# Altium PCB LoRaGW_MiniPCIe.PcbDoc (part 3 of 3)
Units mm, origin at the board's own origin, x right, y up, seen from the top; angles counter-clockwise.
Board outline 30.02 x 79.66 mm, 4 copper layers (Top Layer, GND, PWR, Bottom Layer), stack 1.586 mm thick; 138 components, 116 nets, 568 pads, 433 vias.
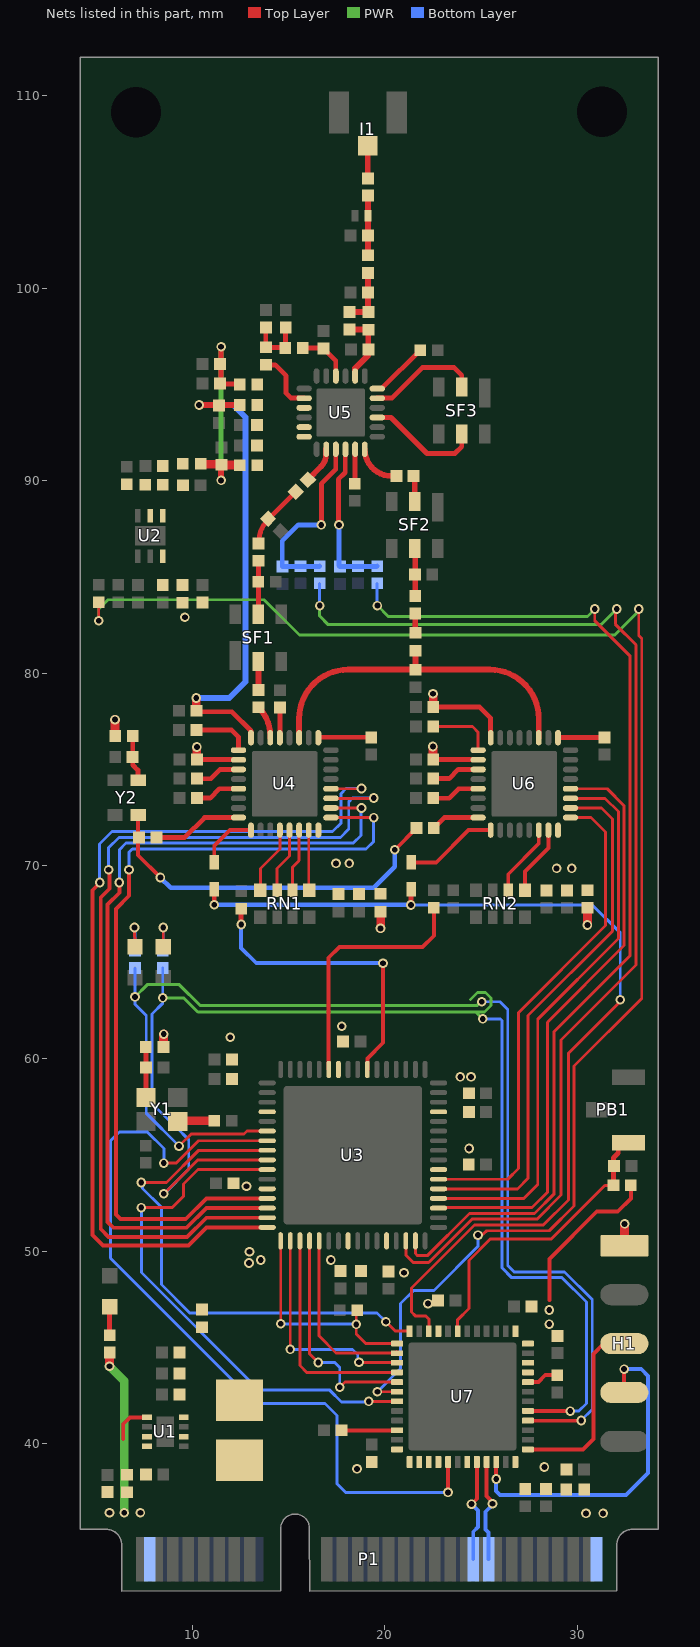
[diagram p4: the nets of this part, all layers, seen from the top]

## Via types
v1: diameter 0.5, hole 0.3, Top Layer to Bottom Layer, tented both sides, 433 vias

## Nets (pads, with @x,y where several pads share a name; then routed paths per layer and width w, separated by ;. In a path a pad name is that pad's centre, name@x,y a point inside that pad or via, vN(x,y) a via of type N, cw(c..) or ccw(c..) an arc to the next point about the centre after c; other vN are vias at no path point) (continued)
GPIO0: U3.58 U7.19 | length 27.1
  Top Layer w0.15: v1@7.442,52.254 8.972,52.254 9.561,52.842 9.561,53.482 10.306,54.228 U3.58@13.9,54.228 ; v1@19.176,42.192 U7.19@20.643,42.193
  Top Layer w0.203: U3.58@13.899,54.229 U3.58@13.9,54.228
  Bottom Layer w0.15: v1(7.366,52.254) 7.366,48.877 13.47,42.774 17.15,42.774 17.757,42.167 19.097,42.167 v1@19.123,42.14
  Bottom Layer w0.203: v1@19.123,42.14 v1(19.175,42.192)
GPIO2: U3.56 U7.12 | length 26.9
  Top Layer w0.15: v1(7.366,53.555) 8.673,53.555 10.346,55.228 U3.56@13.9,55.228 ; v1(20.066,46.33) 20.552,45.843 U7.12@21.293,45.843
  Top Layer w0.203: U7.12@21.273,45.863 U7.12@21.293,45.843
  Bottom Layer w0.15: v1(7.366,53.555) 7.432,53.489 7.432,53.249 8.407,52.273 8.407,48.26 9.881,46.787 19.609,46.787 v1(20.066,46.33)
GPIO3: U3.55 U7.29 | length 42.3
  Top Layer w0.15: v1@8.509,54.566 v1(8.534,54.566) 9.176,54.566 10.338,55.728 U3.55@13.9,55.728
  Top Layer w0.203: v1(23.292,37.465) U7.29@23.293,39.043
  Bottom Layer w0.15: v1(8.534,54.566) 8.534,55.321 7.671,56.185 6.223,56.185 5.766,55.728 5.766,49.629 13.307,42.088 16.894,42.088 17.526,41.456 17.526,37.915 17.976,37.465 v1(23.292,37.465)
IRXD_A: RN1.5 U4.15 | length 3.1
  Top Layer w0.15: U4.15@16.059,71.856 16.059,68.754 RN1.5@16.085,68.727
IRXD_B: RN2.5 U6.15 | length 3.6
  Top Layer w0.2: RN2.5@27.286,68.727 27.286,69.704 28.504,70.922 U6.15@28.504,71.856
ITXD_A: RN1.7 U4.13 | length 3.4
  Top Layer w0.15: RN1.7@14.415,68.727 14.415,69.863 15.059,70.507 U4.13@15.059,71.856
LNA_EN: C35.2 R6.2 R7.2 U5.3 | length 9.9
  Top Layer w0.25: v1(16.713,87.706) 16.713,89.84 17.458,90.584 U5.3@17.458,91.643
  Bottom Layer w0.25: R6.2@16.626,85.565 16.601,85.54 C35.2@14.685,85.54 14.685,86.872 15.519,87.706 v1(16.713,87.706)
MISO_A: U3.62 U4.18 | length 44.3
  Top Layer w0.15: U4.18@17.209,73.006 v1(18.796,73.006)
  Top Layer w0.203: v1(6.223,69.139) 6.223,68.605 5.613,67.996 5.613,51.511 5.918,51.206 9.72,51.206 10.741,52.228 U3.62@13.9,52.228
  Bottom Layer w0.15: v1(6.223,69.139) 6.223,70.841 6.563,71.18 18.374,71.18 18.764,71.571 18.764,72.974 v1(18.796,73.006)
MISO_B: U3.21 U6.18 | length 27.8
  Top Layer w0.15: U3.21@22.8,53.228 26.9,53.228 27.449,53.777 27.449,62.222 31.836,66.608 31.836,72.431 31.261,73.006 U6.18@29.654,73.006
MOSI_A: U3.63 U4.19 | length 47.1
  Top Layer w0.15: U4.19@17.209,73.506 v1@19.431,73.506
  Top Layer w0.203: v1(5.664,69.799) 5.709,69.755 5.709,68.811 5.256,68.358 5.256,51.132 5.664,50.724 9.736,50.724 10.74,51.728 U3.63@13.9,51.728
  Bottom Layer w0.15: v1(5.664,69.799) 5.664,70.942 6.202,71.48 17.709,71.48 18.136,71.907 18.136,73.33 18.329,73.523 v1(19.431,73.523)
MOSI_B: U3.20 U6.19 | length 29.3
  Top Layer w0.15: U3.20@22.8,52.728 27.226,52.728 27.949,53.451 27.949,62.036 32.136,66.223 32.136,72.817 31.447,73.506 U6.19@29.654,73.506
NetC4_2: C4.2 L2.2 U1.5 U1.7 U1.8 | length 2.2
  Top Layer w0.203: 6.426,40.243 6.426,41.021 6.77,41.365 U1.5@7.661,41.365
NetC8_2: C8.2 L5.2 U2.6
NetC36_2: C36.2 U4.1 | length 3
  Top Layer w0.25: C36.2@10.225,77.048 12.055,77.048 12.409,76.694 U4.1@12.409,76.006
NetC37_1: C37.1 U4.30 | length 1.7
  Top Layer w0.3: C37.1@13.45,78.237 cw(c11.98,76.767) 14.059,76.767 U4.30@14.059,76.656
NetC37_2: C37.2 SF1.2 | length 1.5
  Top Layer w0.3: SF1.2@13.437,80.615 cw(c13.404,80.582) 13.45,80.582 C37.2@13.45,79.137
NetC38_1: C38.1 R8.2 R10.2 | length 3.4
  Top Layer w0.25: R8.2@13.45,86.741 cw(c15.261,86.741) 13.98,88.021 C38.1@15.379,89.42
NetC38_2: C38.2 U5.2 | length 1.9
  Top Layer w0.3: C38.2@16.015,90.056 16.698,90.739 ccw(c16.069,91.367) 16.958,91.367 U5.2@16.958,91.643
NetC39_1: C39.1 U4.29 | length 1.6
  Top Layer w0.25: U4.29@14.559,76.656 14.559,78.184 cw(c14.612,78.184) C39.1@14.574,78.221
NetC40_2: C40.2 U4.3 | length 2.4
  Top Layer w0.25: C40.2@10.25,74.529 10.978,74.529 11.455,75.006 U4.3@12.409,75.006
NetC41_2: C41.2 U4.25 | length 2.8
  Top Layer w0.25: U4.25@16.559,76.656 16.578,76.675 C41.2@19.304,76.675
NetC42_1: C42.1 C45.2 L11.1 U5.14 | length 3.7
  Top Layer w0.3: C42.1@18.178,97.851 18.183,97.846 19.147,97.846 L11.1@19.152,97.841 C45.2@19.151,96.825 19.151,96.52 18.467,95.836 18.467,95.453 U5.14@18.458,95.443
NetC42_2: C42.2 C46.2 L11.2 L12.1 | length 3
  Top Layer w0.3: C42.2@18.178,98.751 18.183,98.756 19.147,98.756 L11.2@19.152,98.761 19.142,98.771 19.142,99.762 C46.2@19.133,99.771 L12.1@19.133,100.787
NetC43_2: C43.2 U4.5 | length 2.4
  Top Layer w0.25: C43.2@10.25,73.523 10.937,73.523 11.42,74.006 U4.5@12.409,74.006
NetC44_1: C44.1 C47.2 D2.1 L12.2 | length 3.1
  Top Layer w0.3: C44.1@19.125,104.8 19.133,104.793 L12.2@19.133,101.707
NetC44_2: C44.2 I1.1 | length 1.7
  Top Layer w0.3: I1.1@19.1,107.391 19.125,107.365 C44.2@19.125,105.7
NetC48_2: C48.2 U4.8 | length 4.7
  Top Layer w0.25: C48.2@8.149,71.476 9.622,71.476 10.653,72.506 U4.8@12.409,72.506
NetC49_1: C49.1 L15.2 | length 1
  Top Layer w0.3: C49.1@21.59,83.116 21.59,82.096 L15.2@21.6,82.096 ; L15.2@21.595,82.228 L15.2@21.6,82.223
NetC49_2: C49.2 C54.2 SF2.5 | length 2.5
  Top Layer w0.3: SF2.5@21.558,86.478 cw(c21.558,86.446) 21.59,86.446 C49.2@21.59,84.016
NetC50_1: C50.1 SF2.2 | length 1.4
  Top Layer w0.3: C50.1@21.507,90.246 cw(c21.507,90.194) 21.558,90.194 SF2.2@21.558,88.926
NetC50_2: C50.2 U5.6 | length 2.4
  Top Layer w0.3: U5.6@18.967,91.634 ccw(c20.355,91.634) 20.355,90.246 C50.2@20.607,90.246
NetC51_2: C51.2 C52.2 L13.2 L14.1 | length 3.1
  Top Layer w0.25: C52.2@13.828,97.968 L13.2@13.828,96.936 13.845,96.918 14.811,96.918 14.846,96.953 14.846,97.95 C51.2@14.864,97.968
NetC53_2: C53.2 L14.2 U5.16 | length 2.7
  Top Layer w0.25: L14.2@15.784,96.901 15.796,96.889 16.81,96.889 C53.2@16.823,96.876 17.458,96.241 U5.16@17.458,95.443
NetC55_2: C55.2 U6.1 | length 3.4
  Top Layer w0.15: C55.2@22.523,77.237 24.56,77.237 24.854,76.943 U6.1@24.854,76.006
NetC56_2: C56.2 U6.3 | length 2.5
  Top Layer w0.25: C56.2@22.523,74.535 23.354,74.535 23.825,75.006 U6.3@24.854,75.006
NetC57_2: C57.2 U6.25 | length 2.4
  Top Layer w0.25: U6.25@29.004,76.656 29.014,76.666 31.41,76.666 C57.2@31.42,76.675
NetC58_2: C58.2 U6.5 | length 2.5
  Top Layer w0.25: C58.2@22.523,73.515 23.35,73.515 23.841,74.006 U6.5@24.854,74.006
NetC59_2: C59.2 U6.8 | length 2.5
  Top Layer w0.25: C59.2@22.55,71.958 23.098,72.506 U6.8@24.854,72.506 U6.8@24.848,72.5
NetC60_2: C60.2 L17.2 Y1.4 | length 2.6
  Top Layer w0.25: L17.2@7.595,60.589 7.602,60.583 Y1.4@7.602,57.978
NetC61_2: C61.2 L18.2 Y2.4 | length 2.4
  Top Layer w0.25: L18.2@6.92,76.745 6.92,75.237 7.185,74.971 7.185,74.456 Y2.4@7.199,74.442
NetC63_2: C63.2 U7.22 | length 2.9
  Top Layer w0.203: C63.2@17.757,40.672 20.621,40.672 U7.22@20.643,40.693
NetC64_2: C64.2 PB1.2 R23.1 U7.7 | length 15.7
  Top Layer w0.15: U7.7@23.793,45.843 23.793,46.43 24.372,47.01 24.372,49.513 25.481,50.622 28.651,50.622 31.433,53.404 R23.1@31.884,53.404 ; PB1.2@32.127,55.303 32.452,55.628 PB1.2@32.664,55.628
  Top Layer w0.25: R23.1@31.884,53.404 31.884,54.848 32.127,55.091 PB1.2@32.127,55.303
NetD1_1: D1.1 U4.9 | length 3.1
  Top Layer w0.2: D1.1@11.148,70.18 11.148,71.041 11.963,71.856 U4.9@13.059,71.856
NetD3_1: D3.1 U6.9 | length 4.8
  Top Layer w0.2: D3.1@21.387,70.18 22.682,70.18 24.358,71.856 U6.9@25.504,71.856
NetL1_1: L1.1 U1.2
NetL13_1: L13.1 U5.20 | length 3.2
  Top Layer w0.25: L13.1@13.828,96.016 14.322,96.016 14.884,95.453 14.884,94.539 15.12,94.303 15.798,94.303 U5.20@15.808,94.293
NetL15_1: L15.1 L16.2 U4.27 U6.27 | length 18.3
  Top Layer w0.3: U4.27@15.559,76.656 15.559,77.651 cw(c18.099,77.651) 18.099,80.191 L16.2@21.6,80.191 ; L15.1@21.6,81.176 L16.2@21.6,80.191 ; U6.27@28.004,76.656 28.004,77.651 ccw(c25.464,77.651) 25.464,80.191 L16.2@21.6,80.191
NetLD1_2: LD1.2 R1.1 | length 1.5
  Top Layer w0.25: R1.1@5.715,45.629 5.715,47.095 LD1.2@5.727,47.107
NetLD2_2: LD2.2 R17.2 | length 2
  Top Layer w0.15: LD2.2@8.502,65.799 v1(8.502,66.802)
  Bottom Layer w0.15: R17.2@8.48,65.795 8.502,65.817 v1(8.502,66.802)
NetLD3_2: LD3.2 R15.2 | length 3.4
  Top Layer w0.15: v1(7.01,66.802) LD3.2@7.036,65.799 7.015,66.802 v1@7.01,66.977
  Bottom Layer w0.15: v1@7.01,66.777 7.036,66.751 R15.2@7.036,65.595
NetR2_1: R2.1 R3.2 U2.2
NetR4_1: R4.1 U3.15 | length 54.8
  Top Layer w0.15: U3.15@21.6,50.528 21.604,50.524 21.604,49.875 21.72,49.759 22.214,49.759 24.409,51.954 27.781,51.954 28.803,52.976 28.803,61.391 32.75,65.338 32.75,80.889 30.912,82.728 v1(30.912,83.337)
  PWR w0.15: v1(19.625,83.515) 20.184,82.956 30.531,82.956 v1(30.912,83.337)
  Bottom Layer w0.15: R4.1@19.613,84.665 19.613,83.528 v1(19.625,83.515)
NetR6_1: R6.1 U3.14 | length 60.5
  Top Layer w0.15: U3.14@21.1,50.528 21.1,49.791 21.486,49.405 22.285,49.405 24.534,51.654 27.905,51.654 29.156,52.905 29.156,60.957 33.05,64.851 33.05,81.478 31.979,82.55 v1@31.979,83.312
  PWR w0.15: v1(16.626,83.515) 16.626,82.967 17.069,82.525 31.242,82.525 v1(32.055,83.337)
  Bottom Layer w0.15: v1(16.626,83.515) R6.1@16.626,84.665
NetR8_1: R8.1 R9.2 SF1.5 | length 2.9
  Top Layer w0.25: SF1.5@13.437,83.063 ccw(c13.404,83.095) 13.45,83.095 R8.1@13.45,85.841
  Top Layer w0.3: R9.2@13.341,84.8 cw(c13.341,84.664) R9.2@13.437,84.76
NetR12_1: R12.1 U5.12 | length 3.1
  Top Layer w0.25: U5.12@19.608,94.793 19.858,94.793 R12.1@21.845,96.78
NetR13_2: R13.2 U5.5 | length 1.8
  Top Layer w0.25: U5.5@18.44,91.601 cw(c18.5,91.601) U5.5@18.458,91.643 ; R13.2@18.466,89.823 U5.5@18.466,91.576
NetR14_1: R14.1 U3.39 | length 15.6
  Top Layer w0.203: U3.39@19.1,59.428 19.1,60.001 19.914,60.814 v1(19.914,64.948)
  Top Layer w0.25: v1(12.548,66.954) R14.1@12.548,67.774
  Bottom Layer w0.2: v1(12.548,66.954) 12.548,65.735 13.335,64.948 v1(19.914,64.948)
NetR18_2: R18.2 U3.43 | length 13.2
  Top Layer w0.2: 17.089,65.228 17.646,65.786 21.971,65.786 22.555,66.37 R18.2@22.555,67.825
  Top Layer w0.203: 17.089,65.228 17.089,60.102 17.091,60.099 17.091,59.437 U3.43@17.1,59.428
NetR19_1: R19.1 Y1.3 | length 1.9
  Top Layer w0.45: Y1.3@9.252,56.728 9.292,56.768 R19.1@11.157,56.768
NetR20_1: R20.1 U7.18 | length 81.1
  Top Layer w0.15: v1(5.156,82.728) R20.1@5.156,83.7 ; v1@19.626,42.692 U7.18@20.643,42.693 ; v1(24.848,50.825) 24.915,50.892 25.137,50.892 25.298,51.054 28.55,51.054 29.84,52.345 29.84,59.609 33.35,63.119 33.35,81.813 33.198,81.966 v1@33.198,83.287
  PWR w0.15: v1(5.156,82.728) 5.156,83.337 5.639,83.82 13.741,83.82 15.57,81.991 31.953,81.991 v1@33.198,83.236
  Bottom Layer w0.15: v1(19.625,42.692) 20.828,43.895 20.828,47.269 21.514,47.955 22.555,47.955 24.848,50.248 v1(24.848,50.825)
  other v1: 33.198,83.337
NetR24_2: R24.2 U7.44 | length 1.7
  Top Layer w0.203: U7.44@27.456,43.18 U7.44@27.443,43.193 27.979,43.193 28.339,43.553 R24.2@28.957,43.553
NetSF3_2: SF3.2 U5.11 | length 5.8
  Top Layer w0.25: U5.11@19.608,94.293 19.617,94.303 20.389,94.303 21.971,95.885 23.598,95.885 24.003,95.48 SF3.2@24.003,94.869
NetSF3_5: SF3.5 U5.9 | length 6
  Top Layer w0.25: U5.9@19.608,93.293 U5.9@19.617,93.284 20.331,93.284 22.2,91.415 23.647,91.415 24.003,91.77 SF3.5@24.003,92.421
NSS_A: U3.64 U4.20 | length 47.4
  Top Layer w0.15: U4.20@17.209,74.006 18.786,74.006 v1(18.796,74.016)
  Top Layer w0.203: v1@5.232,69.113 5.204,69.113 4.826,68.735 4.826,50.832 5.366,50.292 9.804,50.292 10.74,51.228 U3.64@13.9,51.228
  Bottom Layer w0.15: v1(5.207,69.139) 5.189,69.157 5.189,71.128 5.842,71.78 17.297,71.78 17.729,72.212 17.729,73.746 17.999,74.016 v1(18.796,74.016)
NSS_B: U3.19 U6.20 | length 30.9
  Top Layer w0.15: U3.19@22.8,52.228 22.826,52.254 27.656,52.254 28.449,53.047 28.449,61.876 32.436,65.862 32.436,73.127 31.556,74.006 U6.20@29.654,74.006
PA12_USB_D_N: P1.36 U7.32 | length 5.4
  Top Layer w0.203: v1(24.511,36.855) 24.793,37.137 U7.32@24.793,39.043
  Bottom Layer w0.203: v1(24.511,36.855) 24.841,36.525 24.841,35.662 24.6,35.42 P1.36@24.6,33.992
PA12_USB_D_P: P1.38 U7.33 | length 5.4
  Top Layer w0.203: U7.33@25.293,39.043 25.291,39.042 25.291,37.273 25.603,36.961 v1(25.603,36.881)
  Bottom Layer w0.203: P1.38@25.4,33.992 25.4,35.39 25.248,35.543 25.248,36.461 25.603,36.817 v1(25.603,36.881)
PA_EN: C34.2 R4.2 R5.2 U5.4 | length 8.2
  Top Layer w0.25: v1(17.628,87.706) 17.6,87.734 17.6,90.068 17.958,90.426 U5.4@17.958,91.643
  Bottom Layer w0.25: v1(17.628,87.706) 17.628,85.584 C34.2@17.672,85.54 19.588,85.54 R4.2@19.613,85.565
QRXD_A: RN1.6 U4.14 | length 3.3
  Top Layer w0.15: RN1.6@15.215,68.727 15.215,69.927 15.559,70.27 U4.14@15.559,71.856
  Top Layer w0.203: U4.14@15.54,71.837 U4.14@15.559,71.856
QRXD_B: RN2.6 U6.14 | length 3.8
  Top Layer w0.2: RN2.6@26.416,68.727 26.416,69.565 28.004,71.153 U6.14@28.004,71.856
QTXD_A: RN1.8 U4.12 | length 3.5
  Top Layer w0.15: RN1.8@13.545,68.727 13.545,69.868 14.559,70.881 U4.12@14.559,71.856
RADIO2_RST: U7.31
RADIO_EN_A: U7.45 | length 0
  Top Layer w0.203: U7.45@27.443,43.693 U7.45@27.444,43.692
RADIO_EN_B: U7.46
RADIO_RST: D1.2 D3.2 U7.10 | length 51.3
  Top Layer w0.15: U7.10@22.293,45.843 22.301,45.852 22.301,46.457 22.123,46.634 21.59,46.634 21.387,46.838 21.387,48.083 24.658,51.354 28.237,51.354 29.54,52.657 29.54,60.271 32.233,62.963 v1(32.233,63.043)
  Top Layer w0.25: v1(11.148,67.982) D1.2@11.148,68.78 ; v1(21.361,67.97) 21.361,68.755 D3.2@21.387,68.78
  Bottom Layer w0.15: v1(21.361,67.97) 30.785,67.97 32.233,66.523 v1(32.233,63.043)
  Bottom Layer w0.25: v1(11.148,67.982) 21.35,67.982 v1(21.361,67.97)
RESET: R11.1 U3.1 U7.13 | length 11.9
  Top Layer w0.15: U3.1@14.6,50.528 14.603,50.525 14.603,46.23 v1(14.605,46.228) ; R11.1@18.524,46.976 v1(18.524,46.19) 18.524,45.687 19.018,45.193 U7.13@20.643,45.193
  Top Layer w0.203: R11.1@18.524,46.976 R11.1@18.567,46.932
  Bottom Layer w0.15: v1@14.605,46.253 14.649,46.209 18.505,46.209 v1(18.524,46.19)
RX_ON: R17.1 U3.57 U7.41 | length 66.7
  Top Layer w0.15: v1@8.539,52.976 10.291,54.728 U3.57@13.9,54.728
  Top Layer w0.203: U7.41@27.443,41.693 29.636,41.693 v1(29.642,41.688)
  PWR w0.15: v1(8.48,63.144) 9.566,63.144 10.298,62.413 24.735,62.413 ; 24.464,63.059 24.821,63.416 25.241,63.416 25.519,63.138 25.519,62.744 25.188,62.413 24.735,62.413 ; v1(25.095,62.052) 24.735,62.413
  Bottom Layer w0.15: R17.1@8.48,64.695 v1(8.48,63.144) 8.48,62.861 7.92,62.301 7.92,57.663 9.144,56.439 9.169,56.439 9.83,55.778 9.83,54.254 8.551,52.976 v1(8.534,52.976) ; v1@24.943,62.052 v1(25.095,62.052) 26.003,62.052 26.091,61.964 26.091,49.126 26.601,48.616 29.218,48.616 30.48,47.353 30.48,42.088 30.08,41.688 v1(29.642,41.688)
SCK_A: U3.61 U4.17 | length 43.9
  Top Layer w0.15: U4.17@17.209,72.506 v1(19.431,72.506)
  Top Layer w0.203: v1(6.727,69.799) 6.725,69.796 6.725,68.447 6.045,67.767 6.045,51.892 6.281,51.656 9.67,51.656 10.741,52.728 U3.61@13.9,52.728
  Bottom Layer w0.15: v1(6.727,69.799) 6.727,70.71 6.898,70.88 19.039,70.88 19.431,71.272 v1(19.431,72.506)
SCK_B: U3.22 U6.17 | length 25.9
  Top Layer w0.15: U3.22@22.8,53.728 26.391,53.728 26.949,54.286 26.949,62.375 31.474,66.9 31.474,71.751 30.72,72.506 U6.17@29.654,72.506
SPI2_MISO: U7.27
SPI2_MOSI: U7.28
SPI2_NSS: U7.25
SPI2_SCK: U7.26
SPI_MISO: U3.3 U7.16 | length 11.7
  Top Layer w0.15: U3.3@15.6,50.528 15.6,44.048 15.955,43.693 U7.16@20.643,43.693
  Top Layer w0.203: U7.16@20.618,43.669 U7.16@20.643,43.693
SPI_MOSI: U3.4 U7.17 | length 11.8
  Top Layer w0.15: U3.4@16.1,50.528 16.1,44.66 v1(16.55,44.21) ; v1(17.669,42.927) 17.935,43.193 20.636,43.193 U7.17@20.639,43.19
  Top Layer w0.203: U7.17@20.639,43.19 U7.17@20.643,43.193
  Bottom Layer w0.15: v1(16.55,44.21) 17.41,44.21 17.669,43.952 v1(17.669,42.927)
SPI_NSS: U3.5 U7.14 | length 9.4
  Top Layer w0.15: U3.5@16.6,50.528 16.6,45.579 17.477,44.702 20.634,44.702 U7.14@20.643,44.693
  Top Layer w0.203: U3.5@16.591,50.519 U3.5@16.6,50.528 ; U7.14@20.613,44.723 U7.14@20.634,44.702
SPI_SCK: U3.2 U7.15 | length 11.7
  Top Layer w0.15: v1(15.1,44.891) U3.2@15.1,50.528 ; v1(18.669,44.227) 18.686,44.21 20.626,44.21 U7.15@20.643,44.193
  Top Layer w0.203: U7.15@20.631,44.182 U7.15@20.643,44.193
  Bottom Layer w0.15: v1(15.1,44.891) 18.33,44.891 18.602,44.619 18.602,44.294 v1(18.669,44.227)
SWCLK: H1.3 U7.37 | length 9.9
  Top Layer w0.203: U7.37@27.443,39.693 30.295,39.693 30.836,40.234 30.836,44.653 31.376,45.193 H1.3@32.451,45.193
SWDIO: H1.4 U7.34 | length 17.6
  Top Layer w0.203: v1(25.793,38.162) U7.34@25.793,39.043 ; v1(32.436,43.866) 32.436,42.669 H1.4@32.451,42.653
  Bottom Layer w0.203: v1(25.793,38.162) 25.793,37.53 25.984,37.338 32.537,37.338 33.68,38.481 33.68,43.51 33.325,43.866 v1(32.436,43.866)
TX_ON: R15.1 U3.54 U7.40 | length 63.1
  Top Layer w0.15: v1(9.322,55.448) 9.957,56.083 12.7,56.083 12.844,56.228 U3.54@13.9,56.228
  Top Layer w0.203: U7.40@27.443,41.193 27.45,41.186 30.191,41.186 v1(30.203,41.199)
  PWR w0.15: v1(7.036,63.195) 7.671,63.83 9.335,63.83 10.406,62.759 24.811,62.759 24.993,62.941 v1(25.044,62.941)
  Bottom Layer w0.15: R15.1@7.036,64.695 v1(7.036,63.195) 7.036,62.814 7.62,62.23 7.62,57.15 v1(9.322,55.448) ; v1(25.044,62.941) 25.984,62.941 26.391,62.535 26.391,49.251 26.726,48.916 29.342,48.916 30.78,47.477 30.78,41.775 v1(30.203,41.199)
VCC0: C33.2 L6.2 U5.23
VCC1: C18.2 L8.2 U5.24
VCC2: L9.2 U5.21
VCC33: C65.2 C66.2 C67.2 C68.2 C69.2 C70.2 C71.2 L19.2 R23.2 U7.1 U7.9 U7.24 U7.36 U7.48 | length 8.4
  Top Layer w0.203: 28.554,47.447 28.554,49.584 31.015,52.045 32.106,52.045 32.784,52.723 R23.2@32.784,53.404 ; L19.2@29.387,37.625 L19.2@29.442,37.571
  other v1: 18.567,38.684 28.296,38.786 28.55,46.203 28.55,46.939 22.25,47.269
VCC_FEM: C17.2 C19.2 C20.2 L7.2 L8.1 L9.1 | length 12.8
  Top Layer w0.25: L7.2@10.439,90.881 L7.2@10.465,90.856 ; C20.2@11.372,95.047 C20.2@11.397,95.021 ; C17.2@11.506,90.856 C17.2@11.532,90.83 C17.2@11.544,90.818 ; v1(11.506,96.952) 11.506,95.105 C20.2@11.448,95.047 11.474,95.021 12.443,95.021 L9.1@12.469,94.996 ; L8.1@12.456,90.818 L8.1@12.469,90.805
  Top Layer w0.3: v1(11.506,90.018) C17.2@11.506,90.856
  Top Layer w0.45: L7.2@10.465,90.856 C17.2@11.506,90.856 ; C17.2@11.544,90.818 L8.1@12.456,90.818
  PWR w0.25: v1(11.506,90.018) v1(11.506,96.952)
VCC_FEM_1: C9.2 C10.2 L7.1 R2.2 U2.1
VCCA_A: C5.2 C14.2 C15.2 C16.2 C32.2 L3.2 L6.1 U4.2 U4.16 U4.32 | length 28.5
  Top Layer w0.25: C14.2@10.225,78.054 10.275,78.003 12.065,78.003 13.059,77.01 U4.32@13.059,76.656 ; C16.2@10.25,75.535 10.269,75.516 12.399,75.516 U4.2@12.409,75.506 ; L6.1@12.451,93.912 L6.1@12.469,93.929
  Top Layer w0.3: v1(10.363,93.929) L6.1@12.469,93.929
  Top Layer w0.45: v1(10.211,78.715) 10.211,78.068 C14.2@10.225,78.054 ; C16.2@10.25,75.535 v1(10.25,76.175)
  Bottom Layer w0.3: v1(10.211,78.715) 11.925,78.715 12.776,79.566 12.776,93.294 12.141,93.929 v1(10.363,93.929)
  other v1: 17.475,70.129 18.161,70.129
VCCA_B: C6.2 C11.2 C12.2 C13.2 L4.2 U6.2 U6.16 U6.32 | length 7.9
  Top Layer w0.25: C6.2@22.523,75.531 22.538,75.516 24.845,75.516 U6.2@24.854,75.506 ; C12.2@22.523,78.257 24.917,78.257 25.504,77.671 U6.32@25.504,76.656
  Top Layer w0.45: v1(22.504,76.2) 22.513,76.191 22.513,75.54 C6.2@22.523,75.531 ; v1(22.513,78.943) 22.518,78.939 22.518,78.262 C12.2@22.523,78.257
  other v1: 28.931,69.868 29.718,69.868
VCCDIG18: C23.2 C24.2 C25.2 C26.2 C27.2 C28.2 L10.2 U3.8 U3.12 U3.23 U3.42 U3.60 | length 0
  Top Layer w0.203: C27.2@12.113,53.489 C27.2@12.142,53.518
  other v1: 21.006,48.87 12.954,49.378 13.564,49.53 17.209,49.53 12.979,49.962 12.827,53.365 24.384,55.321 17.773,61.671
VCCDIG18_1: C2.2 C3.2 C22.2 L1.2 L10.1 U1.4
VCCDIG33: C1.2 C7.2 C21.2 C29.2 C30.2 C31.2 H1.1 L2.1 L3.1 L4.1 L5.1 L17.1 L18.1 L19.1 P1.2 P1.52 R1.2 U3.29 U3.52 | length 13.1
  Top Layer w0.45: v1(5.709,44.018) 5.715,44.025 R1.2@5.715,44.729 ; v1(5.994,77.597) 5.994,77.558 6.02,77.533 6,77.512 L18.1@6,76.745 ; L17.1@8.515,60.589 8.519,60.594 8.519,61.25 v1(8.534,61.265) ; v1(19.787,66.751) 19.791,66.756 L3.1@19.791,67.628 ; v1(30.529,66.929) 30.531,66.93 L4.1@30.531,67.815 ; H1.1@32.451,50.273 32.451,51.4 v1(32.461,51.41)
  PWR w0.45: v1(5.709,44.018) 6.477,43.25 v1(6.477,36.41)
  other v1: 30.455,36.373 31.344,36.373 5.709,36.41 7.318,36.41 23.927,59.041 24.486,59.041 11.977,61.102 9.627,82.906
XTL_OUT: C48.1 C59.1 Y2.3 | length 19
  Top Layer w0.203: Y2.3@7.199,72.642 7.199,70.55 v1(8.357,69.393) ; v1(20.523,70.831) C59.1@21.65,71.958
  Bottom Layer w0.25: v1(8.357,69.393) 8.89,68.859 19.431,68.859 20.523,69.952 v1(20.523,70.831)
pads on no net: P1.1 P1.3 P1.5 P1.6 P1.7 P1.8 P1.10 P1.11 P1.12 P1.13 P1.14 P1.16 P1.17 P1.19 P1.20 P1.22 P1.23 P1.24 P1.25 P1.28 P1.30 P1.31 P1.32 P1.33 P1.39 P1.41 P1.42 P1.44 P1.45 P1.46 P1.47 P1.48 P1.49 P1.51 PB1.3 U2.5 U3.13 U3.16 U3.17 U3.18 U3.25 U3.26 U3.27 U3.28 U3.32 U3.33 U3.37 U3.38 U3.48 U3.49 U4.6 U4.10 U4.21 U4.22 U4.23 U4.24 U5.19 U5.22 U6.6 U6.11 U6.21 U6.22 U6.23 U6.24 U6.29 U6.30 U7.2 U7.3 U7.4 U7.6 U7.11 U7.30 U7.38 U7.39 U7.42 U7.43

## Polygon pours and split planes (outlines as drawn)
GND on PWR "PWR-GND" (solid, remove dead copper, pour order 12): 4.216,112.014 34.29,112.014 34.29,35.535 34.214,35.458 34.099,35.573 4.229,35.573 4.229,111.9 4.267,111.938
VCCDIG33 on PWR "PWR-VCCDIG33" (solid, remove dead copper, pour order 10): 4.216,35.56 4.242,35.585 34.087,35.585 34.214,35.712 34.214,60.096 31.039,63.271 31.039,68.81 30.786,69.063 12.725,69.063 10.249,71.539 10.249,83.731 5.359,83.731 5.359,60.173 5.791,59.741 22.149,59.741 27.864,54.026 27.864,39.649 27.254,39.04 27.203,39.091 4.115,39.091
GND on Bottom Layer "Bottom Layer-GND" (solid, remove dead copper, pour order 4): 4.267,112.014 34.087,112.014 34.188,111.912 34.188,35.56 4.242,35.56 4.216,35.585
GND on GND "GND-GND" (solid, remove dead copper, pour order 6): 4.191,111.989 4.216,112.014 34.163,112.014 34.163,35.56 34.138,35.535 4.216,35.535
GND on Top Layer "Top Layer-GND" (solid, remove dead copper, pour order 8): 4.409,111.887 34.305,111.887 34.356,111.836 34.356,35.408 4.384,35.408 4.359,35.433

## Other copper
Top Layer:
  region net GND: 19.066,48.387 17.015,48.387 16.815,48.187 16.815,46.39 16.933,46.272 17.84,46.272 17.958,46.389 17.958,47.484 18.216,47.742 19.078,47.742 19.113,47.777 19.113,48.339
  region net GND: 7.874,90.424 7.87,90.428 6.155,90.428 6.096,90.487 6.096,91.745 6.21,91.859 7.763,91.859 7.899,91.723 7.899,90.449
  region net GND: 17.958,96.531 17.106,97.384 16.383,97.384 16.332,97.434 16.332,98.679 16.434,98.781 17.262,98.781 17.323,98.72 17.323,97.561 17.653,97.231 18.542,97.231 18.567,97.206 18.567,96.52 18.136,96.088 18.136,95.174 18.059,95.098 17.848,95.098 17.848,95.106 17.805,95.148 17.805,96.743 17.8,96.749
  region net VCCDIG33: 23.673,59.36 24.74,59.36 24.74,56.902 24.708,56.871 23.92,56.871 23.717,57.074 22.377,57.074 22.327,57.125 22.327,57.34 22.39,57.404 23.502,57.404 23.647,57.549 23.647,59.334
  pour cut-out: 14.097,53.035 11.913,53.035 11.735,53.213 11.735,56.54 14.097,56.54
  region net NetR2_1: 6.274,90.119 7.849,90.119 7.899,90.068 7.899,88.951 8.001,88.849 8.001,87.808 7.976,87.782 7.734,87.782 7.645,87.871 7.645,88.697 7.137,89.205 6.318,89.205 6.198,89.325 6.198,90.094
  region net VCC_FEM_1: 8.178,91.338 8.152,91.309 8.149,89.413 8.306,89.256 8.306,87.833 8.331,87.808 8.89,87.808 8.966,87.884 8.966,88.993 9.203,89.23 9.717,89.23 9.855,89.369 9.855,91.309 9.749,91.415 8.242,91.415
  region: 8.204,90.119
  region net VCCDIG33: 9.169,83.998 10.897,83.998 10.978,83.917 10.978,82.565 10.861,82.448 9.195,82.448 9.119,82.525 9.119,83.947
  region net GND: 5.867,84.023 8.788,84.023 8.839,83.972 8.839,82.626 8.661,82.448 6.071,82.448 5.867,82.652
  region: 5.893,84.023
  region net NetC8_2: 8.306,86.446 8.306,85.598 8.001,85.293 8.001,84.379 8.103,84.277 9.804,84.277 9.83,84.303 9.83,85.362 9.645,85.547 8.788,85.547 8.636,85.7 8.636,86.421 8.611,86.446
  region net FEM_EN: 4.801,84.277 7.468,84.277 7.518,84.328 7.518,85.344 7.341,85.522 7.341,86.436 6.883,86.436 6.731,86.284 6.731,85.395 6.401,85.065 4.801,85.065 4.724,84.988 4.724,84.353
  region net GND: 17,95.021 17.12,95.141 17.12,96.037 16.789,96.368 14.887,96.368 14.811,96.291 14.811,95.97 15.455,95.326 16.027,95.326 16.332,95.021
  region net GND: 10.846,96.672 10.77,96.749 9.525,96.749 9.35,96.574 9.35,94.688 9.449,94.59 10.77,94.59 10.846,94.666
  pour cut-out: 15.241,90.359 12.962,90.359 12.812,90.509 12.812,96.006 12.839,96.034 14.648,96.034 15.241,95.441
  region net GND: 12.767,93.218 11.887,93.218 11.786,93.32 10.211,93.32 9.993,93.102 9.993,91.759 10.338,91.415 12.065,91.415 12.167,91.516 12.776,91.516 12.802,91.542 12.802,93.183
  region net GND: 28.067,68.148 29.775,68.148 29.82,68.103 29.82,66.589 29.677,66.446 28.08,66.446 27.991,66.536 27.991,68.072
  region net GND: 26.899,71.399 27.555,71.399 27.656,71.501 27.656,72.242 27.584,72.314 26.924,72.314 26.822,72.212 26.822,71.476 26.848,71.45
  region net GND: 22.377,58.369 22.403,58.395 23.222,58.395 23.266,58.35 23.266,57.633 23.216,57.582 22.428,57.582 22.346,57.664 22.346,58.331
  region net GND: 17.201,67.945 17.018,67.762 17.018,66.573 17.12,66.472 19.025,66.472 19.1,66.547 19.1,67.812 18.967,67.945
  region: 17.12,67.996
  region net GND: 18.995,50.063 19.71,50.063 19.761,50.114 19.761,51.003 19.71,51.054 18.987,51.054 18.95,51.017 18.95,50.093
  region net GND: 16.967,50.071 17.661,50.071 17.757,50.167 17.757,50.971 17.711,51.017 16.981,51.017 16.94,50.976 16.926,50.976 16.926,50.114
  region net GND: 13.513,58.369 14.338,58.369 14.376,58.331 14.376,57.633 14.326,57.582 13.503,57.582 13.437,57.673 13.437,58.293
  region net GND: 24.882,56.81 25.797,56.81 25.924,56.937 25.924,59.268 25.832,59.36 25.044,59.36 24.882,59.198
  pour cut-out: 21.59,46.152 29.274,46.152 29.274,47.511 21.59,47.511
  pour cut-out: 27.48,46.094 27.48,41.554 29.26,41.554 29.26,46.094
  region net VCC33: 27.301,47.625 29.197,47.625 29.388,47.434 29.388,45.288 29.312,45.212 28.194,45.212 28.016,45.034 27.153,45.034 27.127,45.06 27.127,45.415 27.026,45.517 26.654,45.517 26.619,45.552 26.619,46.33 26.797,46.507 27.203,46.507 27.301,46.605
  pour cut-out: 6.869,56.244 11.709,56.244 11.709,58.753 6.869,58.753
  region net GND: 11.514,58.48 10.389,58.48 10.173,58.696 10.173,61.04 10.356,61.223 11.362,61.223 11.527,61.058 11.527,58.591
  region net GND: 20.345,76.124 20.472,75.997 20.472,75.438 20.244,75.209 18.974,75.209 18.974,76.098 18.999,76.124
  region net GND: 8.763,42.139 8.763,45.812 8.703,45.872 7.188,45.872 6.96,45.644 6.96,42.231 7.078,42.113 8.687,42.113
  region net GND: 9.093,41.58
  pour cut-out: 11.125,41.097 13.894,41.097 14.021,41.224 14.021,46.52 14.262,46.761 15.853,46.761 15.955,46.66 15.951,46.656 15.951,40.538 15.896,40.538 15.723,40.365 15.701,40.386 11.148,40.386
  region net VCCDIG18: 10.704,46.635 10.221,46.635 10.069,46.787 10.069,50.038 10.476,50.444 13.638,50.444 13.945,50.138 13.945,46.893 13.687,46.635 10.908,46.635
  region net VCCDIG18_1: 9.957,41.224 10.135,41.402 10.82,41.402 11.125,41.097 13.894,41.097 14.021,41.224 14.021,43.612 13.894,43.739 11.328,43.739 11.328,46.05 10.973,46.406 9.271,46.406 9,46.135 9,42.359 9.322,42.037 9.322,41.224
  region net NetL1_1: 9.296,40.513 9.296,40.208 9.906,40.208 10.185,39.929 10.185,37.973 10.236,37.922 13.868,37.922 13.945,37.998 13.945,40.259 13.818,40.386 10.236,40.386 10.109,40.513
  region: 9.561,40.865
  region net GND: 8.128,41.656 8.103,41.631 8.103,38.049 8.23,37.922 9.068,37.922 9.169,38.024 9.169,41.631 9.093,41.707 8.204,41.707
  region net NetC4_2: 6.274,38.075 7.874,38.075 7.925,38.125 7.925,40.513 7.899,40.538 6.375,40.538 6.274,40.437
  region net GND: 6.274,37.948
  region net VCCDIG33: 5.207,37.77 6.96,37.77 7.036,37.694 7.036,37.033 7.214,36.855 7.798,36.855 7.874,36.779 7.874,35.941 7.823,35.89 5.245,35.89 5.156,35.979 5.156,37.744
  region net VCCA_B: 28.829,72.238 28.829,70.485 28.004,69.66 28.004,68.465 28.042,68.428 30.886,68.428 30.963,68.504 30.963,69.774 29.185,71.552 29.185,72.212 29.108,72.288 28.88,72.288
  region net GND: 21.92,79.654 20.288,79.654 20.022,79.477 20.022,73.272 20.288,73.006 21.901,73.006 22.096,73.201 22.096,79.502
  pour cut-out: 24.512,73.11 22.233,73.11 22.083,73.26 22.083,78.758 22.11,78.785 22.346,78.785 22.346,75.186 22.408,75.124 22.408,74.085 24.36,74.085 24.512,73.934
  pour cut-out: 4.191,75.032 8.23,75.032 8.255,75.006 8.255,72.111 4.267,72.111 4.216,72.06
  pour cut-out: 4.166,76.2
  region net GND: 9.601,78.562 8.433,78.562 8.28,78.41 8.28,73.177 8.509,72.949 9.576,72.949 9.682,73.055 9.682,78.461
  pour cut-out: 12.097,73.134 9.818,73.134 9.668,73.284 9.668,78.782 9.696,78.809 9.931,78.809 9.931,75.209 9.993,75.147 9.993,74.109 11.946,74.109 12.097,73.958
  region net VCCA_A: 16.383,72.263 16.383,70.528 17.018,69.893 17.018,68.301 17.12,68.199 20.142,68.199 20.244,68.301 20.244,69.707 19.39,70.561 17.45,70.561 16.713,71.298 16.713,72.238 16.637,72.314 16.434,72.314
  pour cut-out: 24.795,38.735 29.794,38.76 29.794,37.313 24.795,37.313
  region net GND: 20.963,40.337 20.914,40.386 18.313,40.386 18.204,40.276 18.204,39.653 18.259,39.599 19.732,39.599 20.163,40.03 20.914,40.03 20.963,40.079
  region net VCC33: 20.955,39.878
  pour cut-out: 11.722,60.852 11.722,56.312 13.503,56.312 13.503,60.852
  pour cut-out: 24.74,54.029 24.74,58.649 23.216,58.649 23.216,54.029
  region net GND: 17.935,59.94 18.44,60.445 18.44,62.128 19.355,62.128 19.431,62.052 19.431,60.852 18.796,60.217 18.796,59.041 18.7,58.945 17.995,58.945 17.935,59.004
  pour cut-out: 14.6,36.805 14.603,36.802 14.603,32.36 16.109,32.36 16.1,32.368 16.1,36.805
  region net VCCDIG18: 24.587,54.026 24.74,54.178 24.74,55.689 24.676,55.753 24.003,55.753 23.952,55.702 23.952,54.534 23.8,54.381 22.327,54.381 22.301,54.356 22.301,54.051 22.327,54.026 22.403,54.026
  region net VCCDIG18: 19.964,51.03 19.939,51.005 19.939,49.479 19.787,49.327 19.787,48.636 19.857,48.565 21.387,48.565 21.435,48.613 21.435,49.126 21.361,49.2 20.549,49.2 20.244,49.505 20.244,50.976 20.193,51.026
  region net VCCDIG18: 19.175,48.641 16.926,48.641 16.789,48.778 16.789,49.812 16.888,49.911 17.763,49.911 17.935,50.084 17.935,51.006 17.983,51.054 18.233,51.054 18.288,50.999 18.288,50.071 19.175,49.184
  region net VCC33: 20.218,39.878 19.71,39.37 18.288,39.37 18.178,39.26 18.178,38.337 18.288,38.227 20.066,38.227 20.218,38.379 20.218,39.345 20.391,39.517 20.924,39.517 20.955,39.548 20.955,39.878
  region net VCC33: 22.987,45.542 22.987,46.838 23.19,47.041 23.19,47.879 23.063,48.006 21.869,48.006 21.8,47.937 21.8,47.085 21.996,46.888 22.377,46.888 22.631,46.634 22.631,45.542
  region net VCCDIG33: 30.023,37.989 30.023,36.093 30.201,35.916 31.598,35.916 31.775,36.093 31.775,37.897 31.572,38.1 30.099,38.1
  region net VCC33: 26.6,39.395 26.6,37.433 26.721,37.313 29.743,37.313 29.769,37.338 29.769,39.027 29.603,39.192 27.153,39.192 26.949,39.395
  region net GND: 23.165,91.897 23.165,91.923 23.165,95.377 23.063,95.479 22.25,95.479 20.726,93.955 19.253,93.955 19.177,93.878 19.177,93.677 19.226,93.624 20.746,93.624 22.499,91.872 23.139,91.872
  region net VCC1: 13,92.304 13,90.483 13.11,90.373 14.046,90.373 14.224,90.551 14.224,91.643 14.656,92.075 16.104,92.075 16.231,92.202 16.231,92.396 16.171,92.456 14.554,92.456 14.453,92.354 13.051,92.354
  region net VCC0: 13.059,94.265 13.059,92.507 13.084,92.481 14.275,92.481 14.402,92.608 16.18,92.608 16.231,92.659 16.231,92.913 16.154,92.989 14.63,92.989 13.9,93.72 13.9,94.253 13.792,94.361 13.132,94.361
  region net VCC2: 14.808,93.65 13.97,94.488 13.186,94.488 13.03,94.644 13.03,95.377 13.132,95.479 14.138,95.479 14.351,95.265 14.351,94.645 15.041,93.955 16.154,93.955 16.205,93.904 16.205,93.65
  region net VCCDIG18: 11.786,53.924 12.703,53.924 13.185,53.442 14.326,53.442 14.402,53.365 14.402,53.099 14.338,53.035 11.913,53.035 11.786,53.162
  region: 11.786,53.924
  region net VCCDIG18: 17.493,58.936 17.717,58.936 17.792,59.011 17.792,60.159 18.204,60.571 18.204,62.078 17.34,62.078 17.34,60.206 17.424,60.122 17.424,58.976
  region: 16.967,51.003
  region net VCCDIG33: 14.351,57.074 13.012,57.074 12.875,57.21 12.875,58.135 12.59,58.42 11.76,58.42 11.709,58.471 11.709,61.167 11.765,61.223 12.645,61.223 12.675,61.193 12.675,58.945 13.157,58.462 13.157,57.48 13.284,57.353 14.326,57.353 14.376,57.302 14.376,57.099
  region: 13.9,56.228
  region: 8.813,85.129
GND:
  pour cut-out: 14.554,36.424 16.129,36.424 16.129,32.354 16.109,32.334 14.605,32.334 14.605,36.424 14.58,36.449
PWR:
  region net VCCA_A: 9.525,79.324 9.525,69.647 9.754,69.418 18.692,69.418 18.974,69.7 18.974,70.841 18.821,70.993 11.151,70.993 10.744,71.399 10.744,79.146 10.439,79.451 9.627,79.451
  pour cut-out: 14.605,36.449 14.605,32.334 16.129,32.334 16.117,32.346 16.117,36.449
Bottom Layer:
  region net GND: 14.224,84.963 15.964,84.963 15.977,84.95 15.977,83.338 15.874,83.236 14.351,83.236 14.199,83.388 14.199,84.938
  region net GND: 17.348,84.938 17.374,84.963 18.898,84.963 19,84.861 19,83.262 18.872,83.134 17.475,83.134 17.348,83.261
  region net VCCA_B: 21.819,79.502 21.819,69.342 22.2,68.961 30.734,68.961 30.937,69.164 30.937,70.358 30.759,70.536 24.028,70.536 23.063,71.501 23.063,79.483 22.892,79.654 21.971,79.654
  pour cut-out: 14.656,36.41 14.656,32.36 14.63,32.334 16.109,32.334 16.109,36.398
  region net VCCDIG18: 23.103,55.946 23.103,51.755 21.565,50.216 13.868,50.216 13.233,50.851 13.233,59.614 14.478,60.858 17.661,60.858 17.856,61.053 17.856,62.23 17.729,62.357 13.868,62.357 11.735,60.223 11.735,49.174 12.522,48.387 21.742,48.387 24.74,51.384 24.74,55.99 24.536,56.159 23.317,56.159
  region net VCC33: 18.288,38.252 23.622,38.252 24.13,38.76 26.518,38.76 27.229,38.049 28.905,38.049 29.185,38.329 29.185,47.523 29.108,47.6 21.869,47.6 21.8,47.53 21.8,46.272 21.895,46.177 27.127,46.177 27.534,45.771 27.534,39.878 27.178,39.522 18.339,39.522 18.186,39.37 18.161,39.37 18.161,38.354
  region net VCCDIG33: 30.683,32.817 30.683,35.408 30.023,36.068 30.023,36.652 30.099,36.728 31.725,36.728 31.775,36.678 31.775,32.918 31.674,32.817
  region net VCCDIG33: 8.103,32.842 8.103,37.516 7.95,37.668 5.258,37.668 5.156,37.567 5.156,36.017 5.283,35.89 7.264,35.89 7.493,35.662 7.493,32.842

## Silkscreen, mask and mechanical layers (free items; w line width, h text height)
Top Overlay:
  drawing of 284 lines, arcs and shapes, not listed
  text "GateWay LoRaWAN" at 30.937,84.785 h2.54 r90
  text "Designer: MDBK" at 28.55,49.835 h2.03 r90
Mechanical 1:
  drawing of 179 lines, arcs and shapes, not listed

## Text inside footprints (layer, text, board x,y; h text height)
H1: Top Overlay "1" at 32.151,51.473 h0.7 r270